# Altium PCB Earphone-3.PcbDoc
Units mm, origin at the board's own origin, x right, y up, seen from the top; angles counter-clockwise.
Board outline 24.54 x 47.47 mm, 2 copper layers (Top Layer, Bottom Layer); 43 components, 25 nets, 160 pads, 24 vias.
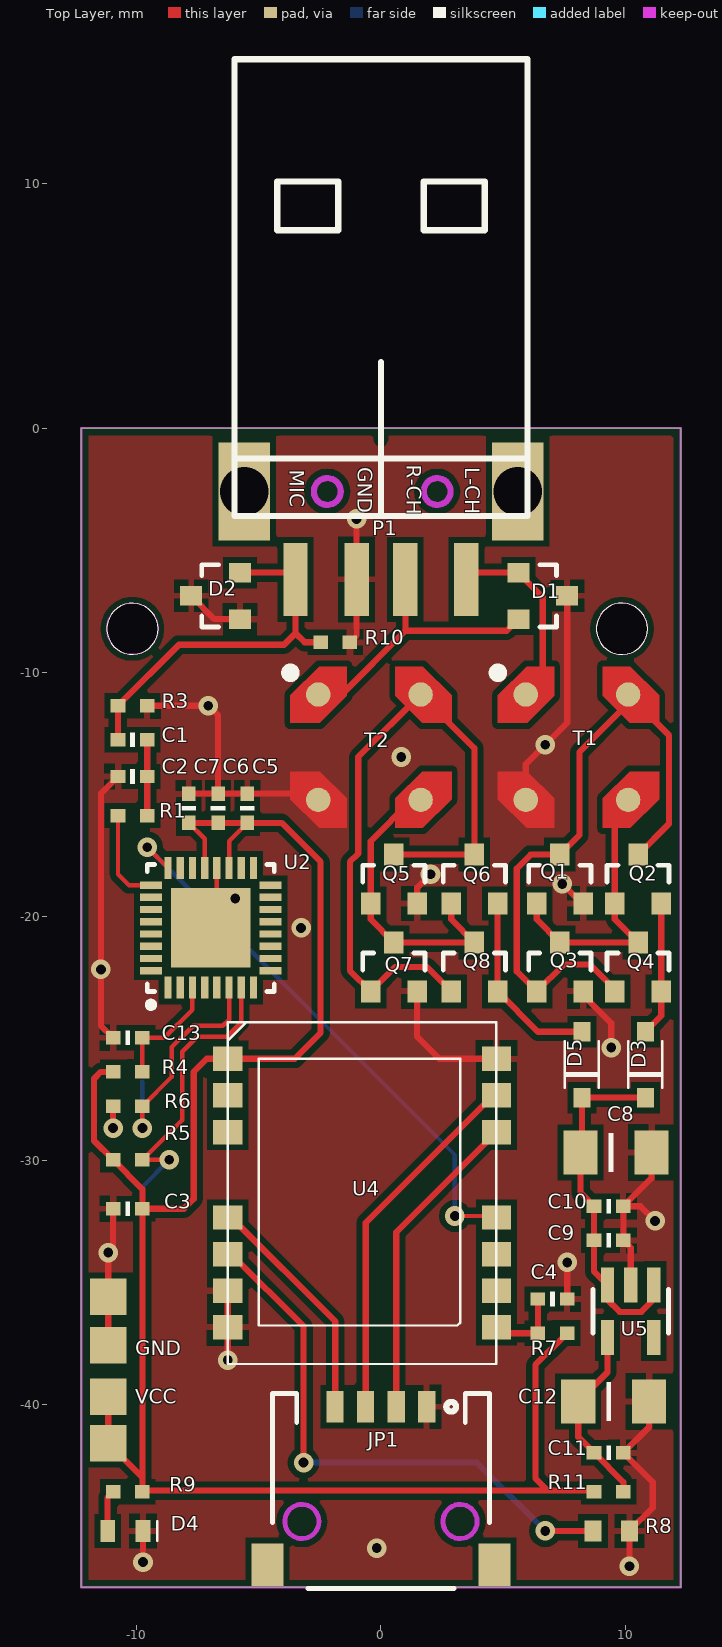
[diagram p0: Top Layer view]
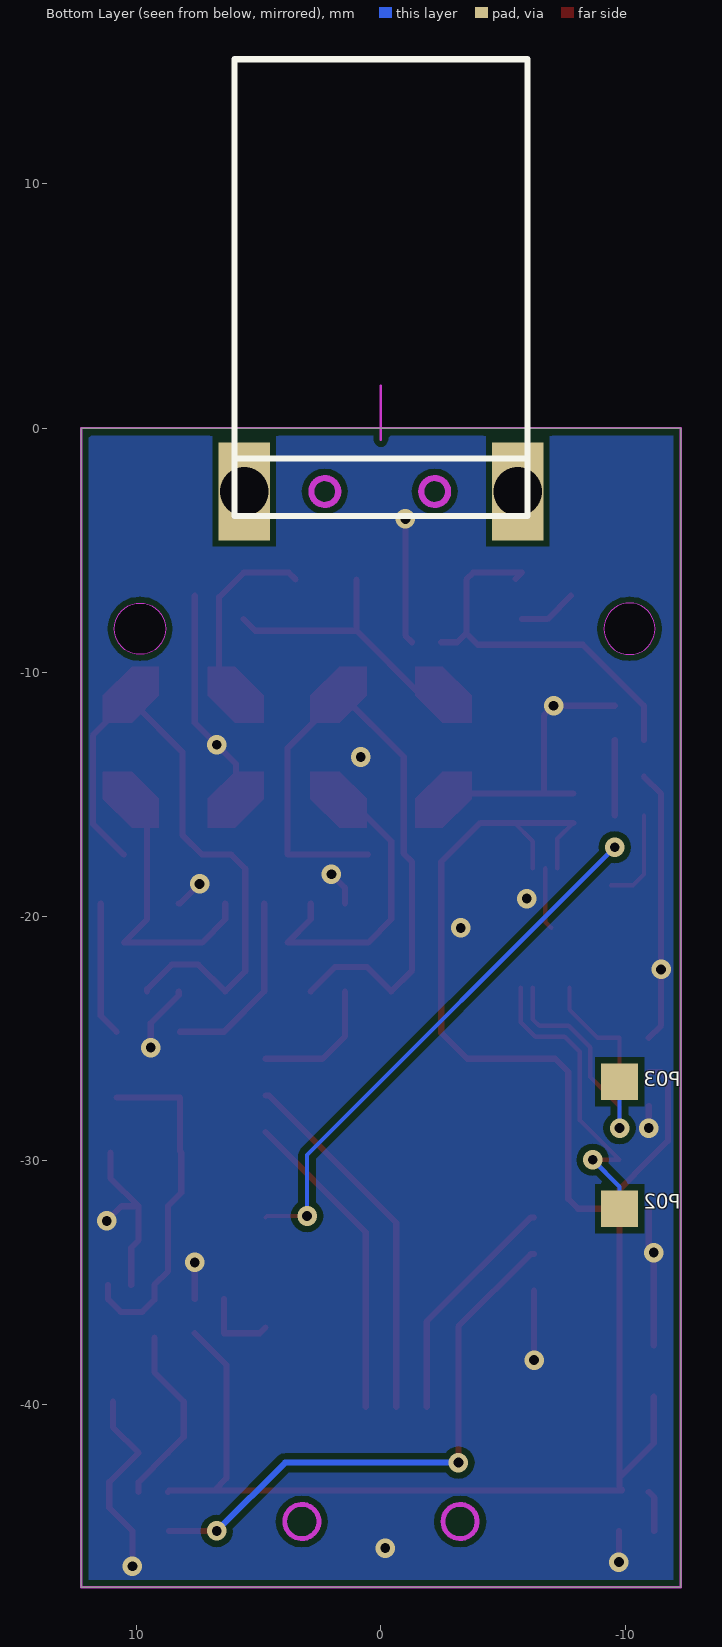
[diagram p1: Bottom Layer view, seen from below]
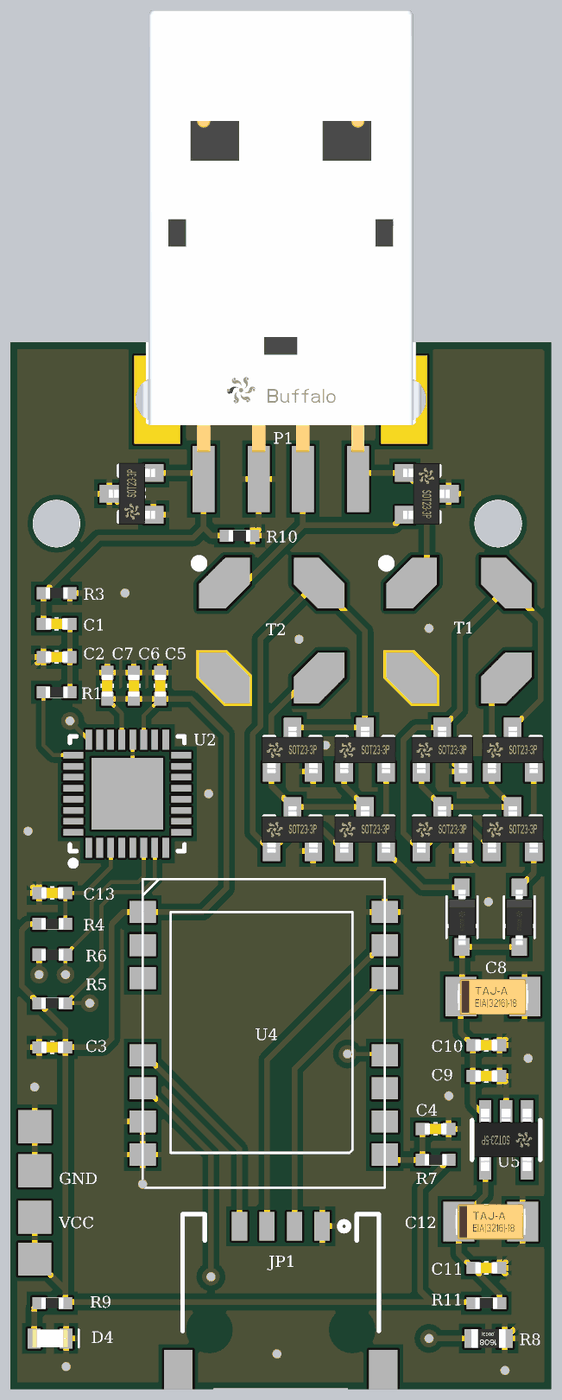
[diagram p2: 3D render of the assembled board from above, using the file's embedded part models]

## Layer stack, top to bottom
Top Solder: solder mask 0.0102, Solder Resist, Dk 3.5
Top Layer: signal copper 0.0356
Dielectric1: dielectric 0.32, FR-4, Dk 4.8
Bottom Layer: signal copper 0.0356
Bottom Solder: solder mask 0.0102, Solder Resist, Dk 3.5

## Board outline
-12.272,-47.474 -12.272,0 12.272,0 12.272,-47.474
cut-out: -10.182,-9.274 cw(c-10.182,-8.224) -11.232,-8.224 cw(c-10.182,-8.224) -10.182,-7.174 cw(c-10.182,-8.224) -9.132,-8.224 cw(c-10.182,-8.224)
cut-out: 8.818,-8.224 ccw(c9.868,-8.224) 9.868,-9.274 ccw(c9.868,-8.224) 10.918,-8.224 ccw(c9.868,-8.224) 9.868,-7.174 ccw(c9.868,-8.224)

## Design rules (kind name [scope] priority, off if disabled: settings)
Clearance [All] p1: gap=0.254
FabricationTestPointUsage TestPointUsage [All] p1: valid=0 allowmultiple=FALSE
FabricationTestpoint Testpoint [All] p1: side=3 testpointundercomponent=TRUE minsize=1.016 maxsize=2.54 preferedsize=1.524 minholesize=0 maxholesize=1.016 preferedholesize=0.813 testpointgrid=0.025 allowsidetop=TRUE allowsidebottom=TRUE usegrid=TRUE gridtolerance=0
HoleSize [All] p1: absolutevalues=TRUE maxlimit=2.54 minlimit=0.1 maxpercent=80.000 minpercent=20.000
HoleToHoleClearance [All] p1: gap=0.2 allowstackedmicrovias=TRUE
MinimumSolderMaskSliver [All] p1: minsoldermaskwidth=0.1
PolygonConnect PolygonConnect_1 [IsVia] p1: connectstyle=Direct reliefconductorwidth=0.254 reliefentries=4 polygonreliefangle="90 Angle" airgapwidth=0.254
PolygonConnect [All] p2: connectstyle=Relief reliefconductorwidth=0.254 reliefentries=4 polygonreliefangle="90 Angle" airgapwidth=0.254
RoutingVias [All] p1: holewidth=0.711 width=1.27 viastyle="Through Hole" minholewidth=0.1 minwidth=0.1 maxholewidth=0.711 maxwidth=1.27
SilkToSilkClearance [All] p1: silktosilkclearance=0.1
SilkToSolderMaskClearance SilkscreenOverComponentPads [IsPad] p1: minsilkscreentomaskgap=0.1 clearancetoexposedcopper=TRUE
SolderMaskExpansion [All] p1: expansion=0.102
Width [All] p1: maxlimit=0.254 minlimit=0.1 preferedwidth=0.254 minimp=50.000000 maximp=50.000000 favimp=50.000000
23 further rules are at their usual default settings.

## Components (designator, comment, footprint, x,y, rotation, side; value= is the part's Value field where it differs from the comment)
C1 "2.2uF" 0402C -10.172,-12.774 r0 top
C2 "47pF" 0402C -10.172,-14.274 r0 top
C3 "10uF" 0402C -10.372,-31.974 r180 top
C4 "1uF" 0402C 7.028,-35.674 r180 top
C5 "0.01uF" 0402C -5.472,-15.574 r270 top
C6 "0.01uF" 0402C -6.672,-15.574 r270 top
C7 "0.01uF" 0402C -7.872,-15.574 r270 top
C8 "CP6032-100uF" T3216-18[A] 9.628,-29.674 r0 top
C9 "1uF" 0402C 9.328,-33.274 r180 top
C10 "10uF" 0402C 9.328,-31.874 r180 top
C11 "10uF" 0402C 9.328,-41.974 r180 top
C12 "CP6032-100uF" T3216-18[A] 9.528,-39.874 r0 top
C13 "1uF" 0402C -10.372,-24.974 r0 top
D1 "PESD5V2S2UT" SOT23 6.628,-6.874 r270 top
D2 "PESD5V2S2UT" SOT23 -6.772,-6.874 r90 top
D3 "PMEG4002EJ" SOD323 10.828,-26.074 r90 top
D4 "LED" 0603L -10.472,-45.174 r0 top
D5 "PMEG4002EJ" SOD323 8.228,-26.074 r90 top
JP1 "TEST_PAPER" TEST_PAPER 0,-43.337 r0 top
P1 "EarPhone" USB-A 0,-4.4 r270 top
Q1 "N-MOSFET" SOT23 7.328,-18.474 r0 top
Q2 "P-MOSFET" SOT23 10.528,-18.474 r0 top
Q3 "N-MOSFET" SOT23 7.328,-22.074 r0 top
Q4 "P-MOSFET" SOT23 10.528,-22.074 r0 top
Q5 "N-MOSFET" SOT23 0.528,-18.474 r0 top
Q6 "P-MOSFET" SOT23 3.828,-18.474 r0 top
Q7 "N-MOSFET" SOT23 0.528,-22.074 r0 top
Q8 "P-MOSFET" SOT23 3.828,-22.074 r0 top
R1 "1K" 0402R -10.172,-15.874 r0 top
R3 "1K" 0402R -10.172,-11.374 r0 top
R4 "10K" 0402R -10.372,-26.374 r180 top
R5 "10K" 0402R -10.372,-29.974 r0 top
R6 "10K" 0402R -10.372,-27.774 r180 top
R7 "10K" 0402R 7.028,-37.074 r0 top
R8 "NTC" 0603R 9.428,-45.174 r180 top
R9 "10K" 0402R -10.372,-43.574 r180 top
R10 "2.2K" 0402R -1.872,-8.774 r0 top
R11 "0R" 0402R 9.328,-43.574 r180 top
T1 "LPR6235" "TRANS EMI" 8.028,-13.074 r0 top
T2 "LPR6235" "Trans EMI" -0.472,-13.074 r0 top
U2 "LPC822M101JHI33" QFN50P500X500X100-33N -6.972,-20.474 r90 top
U4 "RB1402" RB1402 -0.772,-31.336 r0 top
U5 "MIC5231" SOT23-5 10.228,-36.174 r180 top

## Footprints (in the part's own frame and the unit in brackets; to place one, negate y for a bottom-side part, rotate by r counter-clockwise, add the part's x,y. Pads: shape width x height; smd on the part's side, far side on the other; paste and mask are expansions set on the pad)
0402C [mm]
  rect 0.6x0.55 smd: 1(-0.6,0) 2(0.6,0)
  silkscreen extent -0.1,-0.3 0.1,0.3, body extent -0.5,-0.25 0.5,0.25, height 0.5
0402R [mm]
  rect 0.6x0.55 smd: 1(-0.6,0) 2(0.6,0)
  body extent -0.5,-0.25 0.5,0.25, height 0.35
0603L [mm]
  rect 0.6x0.9 smd: 1(-0.725,0) 2(0.725,0)
  silkscreen extent 1.3,-0.4 1.3,0.4, body extent -0.8,-0.41 0.8,0.39, height 0.6
0603R [mm]
  rect 0.7x0.85 smd: 1(-0.75,0) 2(0.75,0)
  body extent -0.77,-0.43 0.77,0.43, height 0.46
QFN50P500X500X100-33N [mm]
  rect 0.9x0.3 smd: 1(-2.45,1.75) 2(-2.45,1.25) 3(-2.45,0.75) 4(-2.45,0.25) 5(-2.45,-0.25) 6(-2.45,-0.75) 7(-2.45,-1.25) 8(-2.45,-1.75) 17(2.45,-1.75) 18(2.45,-1.25) 19(2.45,-0.75) 20(2.45,-0.25) 21(2.45,0.25) 22(2.45,0.75) 23(2.45,1.25) 24(2.45,1.75)
  rect 0.3x0.9 smd: 9(-1.75,-2.45) 10(-1.25,-2.45) 11(-0.75,-2.45) 12(-0.25,-2.45) 13(0.25,-2.45) 14(0.75,-2.45) 15(1.25,-2.45) 16(1.75,-2.45) 25(1.75,2.45) 26(1.25,2.45) 27(0.75,2.45) 28(0.25,2.45) 29(-0.25,2.45) 30(-0.75,2.45) 31(-1.25,2.45) 32(-1.75,2.45)
  rect 3.25x3.25 smd: 33(0,0)
  silkscreen extent -3.27,-2.6 2.6,2.6
RB1402 [mm]
  rect 1.2x1 smd: 1(-5.5,5.5) 2(-5.5,4) 3(-5.5,2.5) 4(-5.5,-1) 5(-5.5,-2.5) 6(-5.5,-4) 7(-5.5,-5.5) 8(5.5,-5.5) 9(5.5,-4) 10(5.5,-2.5) 11(5.5,-1) 12(5.5,2.5) 13(5.5,4) 14(5.5,5.5)
  silkscreen extent -5.5,-7 5.5,7
SOD323 [mm]
  rect 0.8x0.7 smd: 1(-1.35,0) 2(1.35,0)
  silkscreen extent -0.95,-0.7 0.95,0.7, body extent -1.26,-0.63 1.24,0.63, height 1.1
SOT23 [mm]
  rect 0.8x0.9 smd: 1(-0.95,-1) 2(0.95,-1) 3(0,1)
  silkscreen extent -1.28,-0.13 1.28,0.57, body extent -1.4,-1.07 1.4,1.03, height 0.9
SOT23-5 [mm]
  rect 0.55x1.45 smd: 1(-0.95,-1.075) 2(0,-1.075) 3(0.95,-1.075) 4(0.95,1.075) 5(-0.95,1.075)
  silkscreen extent -1.55,-0.9 1.55,0.9, body extent -1.45,-1.42 1.45,1.4, height 1.1
T3216-18[A] [mm]
  rect 1.4x1.8 smd: 1(-1.45,0) 2(1.45,0)
  silkscreen extent -0.3,-0.8 -0.1,0.8, body extent -1.6,-0.81 1.6,0.79, height 1.62
TEST_PAPER [mm]
  rect 1.3x1.8 smd: 0(-4.65,-3.25) 0(4.65,-3.25)
  rect 0.7x1.3 smd: 1(1.875,3.25) 2(0.625,3.25) 3(-0.625,3.25) 4(-1.875,3.25)
  Keep-Out Layer circle w0.2: c3.24,-1.45 r0.7
  Keep-Out Layer circle w0.2: c-3.24,-1.45 r0.7
  silkscreen extent -4.45,-4.2 4.45,3.8
"TRANS EMI" [mm]
  round 1 smd: 1(-2.095,2.159) 2(-2.095,-2.159) 3(2.095,-2.159) 4(2.095,2.159)
  Top Layer region: 1.064,2.1 2.164,1 3.364,1 3.364,2.125 2.188,3.3 1.064,3.3
  Top Layer region: 1.064,-3.3 1.064,-2.1 2.164,-1 3.364,-1 3.364,-2.125 2.188,-3.3
  Top Layer region: -3.237,-2.125 -2.061,-3.3 -0.937,-3.3 -0.937,-2.1 -2.037,-1 -3.237,-1
  Top Layer region: -3.237,1 -3.237,2.125 -2.061,3.3 -0.937,3.3 -0.937,2.1 -2.037,1
  silkscreen extent -3.37,2.92 -3.11,3.17
"Trans EMI" [mm]
  round 1 smd: 1(-2.095,2.159) 2(-2.095,-2.159) 3(2.095,-2.159) 4(2.095,2.159)
  Top Layer region: 1.064,2.1 2.164,1 3.364,1 3.364,2.125 2.188,3.3 1.064,3.3
  Top Layer region: 1.064,-3.3 1.064,-2.1 2.164,-1 3.364,-1 3.364,-2.125 2.188,-3.3
  Top Layer region: -3.237,-2.125 -2.061,-3.3 -0.937,-3.3 -0.937,-2.1 -2.037,-1 -3.237,-1
  Top Layer region: -3.237,1 -3.237,2.125 -2.061,3.3 -0.937,3.3 -0.937,2.1 -2.037,1
  silkscreen extent -3.37,2.92 -3.11,3.17
USB-A [mm]
  rect 3x1 smd: 1(1.8,3.5) 2(1.8,1) 3(1.8,-1) 4(1.8,-3.5)
  rect 4x2.1 hole 2: 5(-1.8,5.6) 6(-1.8,-5.6)
  Keep-Out Layer circle w0.254: c-1.8,-2.2 r0.55
  Keep-Out Layer circle w0.254: c-1.8,2.3 r0.55
  silkscreen extent -19.5,-6 -0.8,6, body extent -19.43,-6.35 0.59,6.35, height 3.1

## Part data
C1 C2 C3 C4 C5 C6 C7 C9 C10 C11 C13: library part CAP
C8 C12: library part "CAP POL2"
D1 D2: "SOT23"
D3 D5: "SOD323F"
Q1 Q3 Q5 Q7: "4N80 N-Channel MOSFET"
Q2 Q4 Q6 Q8: "P-Channel MOSFET"
R1 R3 R4 R5 R6 R7 R8 R9 R10 R11: library part RES
T1 T2: library part "Trans EMI"

## Free pads (board coordinates)
  rect 1.5x1.5 smd far side: 0(-9.772,-26.774) 1(-9.772,-31.974)
  rect 1.5x1.5 smd: 1(-11.172,-41.574) 1(-11.172,-39.674) 1(-11.172,-37.574) 1(-11.172,-35.574)

## Via types
v1: diameter 0.8, hole 0.4, Top Layer to Bottom Layer, tented both sides, 24 vias

## Nets (pads, with @x,y where several pads share a name; then routed paths per layer and width w, separated by ;. In a path a pad name is that pad's centre, name@x,y a point inside that pad or via, vN(x,y) a via of type N, cw(c..) or ccw(c..) an arc to the next point about the centre after c; other vN are vias at no path point)
AINO: JP1.4 U4.4 | length 9.7
  Top Layer w0.254: U4.4 -6.133,-32.336 -1.875,-36.593 JP1.4
GND: C2.1 C3.2 C4.1 C5.1 C6.1 C7.1 C8.2 C9.1 C10.1 C11.1 C12.2 C13.1 D1.3 D2.1 D2.3 D4.2 JP1.1 P1.3 pad.1@-11.172,-35.574 pad.1@-11.172,-37.574 Q1.2 Q3.2 Q5.2 Q7.2 R3.2 R6.2 R8.1 R10.2 T1.2 T2.2 U2.20 U2.33 U4.6 U4.7 U4.14 U5.2 | length 80.8
  Top Layer w0.18: U2.33 -6.722,-20.224 U2.20
  Top Layer w0.254: pad.1@-11.172,-37.574 -11.172,-35.574 v1(-11.172,-33.774) -10.972,-33.574 C3.2 ; v1(-10.972,-28.674) R6.2 ; C13.1 -11.472,-24.474 -11.472,-14.974 C2.1 ; v1(-9.747,-46.449) D4.2 ; R3.2 v1(-7.072,-11.374) -6.672,-11.774 C6.1 ; C7.1 C6.1 ; D2.3 -6.822,-7.824 D2.1 ; v1(-6.272,-38.174) U4.7 U4.6 ; T2.2 -2.826,-14.974 C5.1 C6.1 ; R10.2 -1,-8.502 P1.3 v1(-1,-3.724) ; Q7.2 1.478,-24.924 2.39,-25.836 U4.14 ; Q5.2 1.478,-18.824 v1(2.028,-18.274) ; T1.2 5.933,-13.769 v1(6.728,-12.974) 7.628,-12.074 D1.3 ; v1(7.428,-18.674) 8.228,-19.474 Q1.2 ; C4.1 v1(7.628,-34.174) ; Q3.2 8.278,-23.224 9.428,-24.374 v1(9.428,-25.374) ; v1(10.178,-46.624) R8.1 11.128,-44.224 11.128,-43.174 C11.1 10.978,-40.924 C12.2 ; U5.2 10.228,-33.574 C9.1 C10.1 ; C8.2 11.078,-30.724 C10.1 ; v1(11.228,-32.474) 10.628,-31.874 C10.1
  other v1: -0.172,-45.874 -11.472,-22.174 -3.272,-20.474 -5.972,-19.274 0.828,-13.474
L-CH: D1.1 P1.1 T1.1 | length 7.8
  Top Layer w0.254: P1.1 3.776,-5.924 D1.1 6.628,-6.924 6.628,-10.519 T1.1@6.233,-10.915
MIC: C1.1 D2.2 P1.4 R3.1 R10.1 | length 16
  Top Layer w0.254: C1.1 R3.1 -8.272,-8.874 -3.972,-8.874 -3.5,-8.402 ; D2.2@-5.523,-6.173 D2.2 -3.776,-5.924 P1.4 -3.5,-8.402 ; R10.1 -3.128,-8.774 -3.5,-8.402
NetC1_2: C1.2 C2.2 R1.2 | length 3.1
  Top Layer w0.254: R1.2 C2.2 C1.2
NetC4_2: C4.2 R7.1 U4.8 | length 3.2
  Top Layer w0.254: U4.8 4.966,-37.074 R7.1 C4.2
NetC11_2: C11.2 C12.1 R11.1 U5.4 | length 7.6
  Top Layer w0.254: U5.4 9.278,-38.674 C12.1 8.078,-41.324 C11.2 9.928,-43.174 R11.1
NetD3_2: D3.2 Q2.2 Q4.2 | length 5.5
  Top Layer w0.254: D3.2 11.478,-24.074 Q4.2 Q2.2
NetD4_1: D4.1 R9.2 | length 1.7
  Top Layer w0.254: D4.1 -11.197,-43.799 R9.2
NetD5_2: D5.2 Q6.2 Q8.2 | length 7.7
  Top Layer w0.254: Q6.2 Q8.2 6.428,-24.724 D5.2
NetQ1_1: Q1.1 Q2.1 Q3.3 Q4.3 T1.3 | length 11.7
  Top Layer w0.254: Q1.1 6.378,-20.124 Q3.3 Q4.3 9.578,-20.124 Q2.1 9.578,-15.778 T1.3
NetQ1_3: Q1.3 Q2.3 Q3.1 Q4.1 T1.4 | length 27
  Top Layer w0.254: Q4.1 9.578,-22.985 8.567,-21.974 7.478,-21.974 Q3.1 5.559,-22.255 5.559,-18.043 6.128,-17.474 Q1.3 8.128,-16.674 8.128,-13.274 10.124,-11.278 T1.4 11.797,-12.588 11.797,-16.205 Q2.3
NetQ5_1: Q5.1 Q6.1 Q7.3 Q8.3 T2.3 | length 12.6
  Top Layer w0.254: T2.3 1.269,-15.233 -0.422,-16.924 Q5.1 -0.422,-20.124 Q7.3 Q8.3 2.878,-20.124 Q6.1
NetQ5_3: Q5.3 Q6.3 Q7.1 Q8.1 T2.4 | length 28.6
  Top Layer w0.254: Q5.3 Q6.3 3.828,-13.119 T2.4 -0.93,-13.468 -0.93,-17.432 -1.272,-17.774 -1.272,-22.224 Q7.1 0.578,-22.074 1.878,-22.074 Q8.1
NTC: R8.2 U4.5 | length 22.9
  Top Layer w0.254: U4.5 -6.133,-33.836 -3.172,-36.797 v1(-3.172,-42.374) ; v1(6.728,-45.174) R8.2
  Bottom Layer w0.254: v1(-3.172,-42.374) 3.928,-42.374 v1(6.728,-45.174)
P02: pad.1@-9.772,-31.974 R5.2 U2.7 | length 13
  Top Layer w0.18: v1(-8.672,-29.974) R5.2 -8.143,-28.345 -8.143,-25.545 -7.529,-24.93 -6.315,-24.93 -5.722,-24.337 U2.7
  Bottom Layer w0.18: pad.1@-9.772,-31.974 -9.772,-31.074 v1(-8.672,-29.974)
P03: pad.0 R6.1 U2.6 | length 9.8
  Top Layer w0.18: v1(-9.772,-28.674) R6.1 -8.577,-26.579 -8.577,-25.365 -7.692,-24.48 -6.479,-24.48 -6.222,-24.224 U2.6
  Bottom Layer w0.18: v1(-9.772,-28.674) pad.0
P05: C13.2 R4.1 U2.3 | length 4.8
  Top Layer w0.18: R4.1 C13.2 -8.872,-24.974 -7.722,-23.824 U2.3
P14: R1.1 U2.25 | length 3.9
  Top Layer w0.18: R1.1 -10.772,-18.274 -10.322,-18.724 U2.25
PT15: JP1.2 U4.12 | length 13
  Top Layer w0.254: JP1.2 0.625,-32.939 U4.12
PT16: JP1.3 U4.13 | length 15
  Top Layer w0.254: JP1.3 -0.625,-32.55 4.589,-27.336 U4.13
R-CH: D1.2 P1.2 T2.1 | length 11.6
  Top Layer w0.254: T2.1 -1.613,-10.915 1,-8.302 ; P1.2 1,-8.302 ; D1.2 5.15,-8.302 1,-8.302
RXD: U2.24 U4.11 | length 23.2
  Top Layer w0.18: v1(-9.572,-17.174) U2.24 ; v1(3.028,-32.274) 4.666,-32.274 U4.11
  Bottom Layer w0.18: v1(-9.572,-17.174) 3.028,-29.774 v1(3.028,-32.274)
VCC: C3.1 C5.2 C6.2 C7.2 pad.1@-11.172,-39.674 pad.1@-11.172,-41.574 R4.2 R5.1 R7.2 R9.1 R11.2 U2.19 U2.21 U4.1 | length 78.9
  Top Layer w0.18: C7.2 -7.222,-16.824 U2.21 ; U2.19 -6.222,-16.924 C5.2
  Top Layer w0.254: pad.1@-11.172,-39.674 -11.172,-41.574 -9.772,-42.974 ; R4.2 -11.472,-26.374 -11.753,-26.655 -11.753,-29.193 R5.1 -9.772,-31.174 C3.1 ; R9.1@-9.872,-43.474 -9.872,-43.519 6.828,-43.519 ; R9.1@-9.772,-43.419 -9.772,-42.974 ; C7.2 C6.2 C5.2 -4.072,-16.174 -2.472,-17.774 -2.472,-24.774 -3.534,-25.836 U4.1 -7.134,-25.836 -7.672,-26.374 -7.672,-31.574 -8.072,-31.974 C3.1 ; R7.2 6.328,-38.374 6.328,-43.019 6.828,-43.519 ; R11.2 8.674,-43.519 6.828,-43.519 ; -9.772,-42.974 C3.1
VCCIN: C8.1 C9.2 C10.2 D3.1 D5.1 U5.1 U5.3 | length 14.2
  Top Layer w0.254: C8.1 8.178,-31.324 C10.2 C9.2 8.728,-34.549 U5.3 9.278,-35.71 9.773,-36.205 10.661,-36.205 11.178,-35.687 U5.1 ; C8.1@8.228,-29.624 D5.1 D3.1
pads on no net: JP1.0 P1.5 P1.6 U2.1 U2.2 U2.4 U2.5 U2.8 U2.9 U2.10 U2.11 U2.12 U2.13 U2.14 U2.15 U2.16 U2.17 U2.18 U2.22 U2.23 U2.26 U2.27 U2.28 U2.29 U2.30 U2.31 U2.32 U4.2 U4.3 U4.9 U4.10 U5.5

## Polygon pours and split planes (outlines as drawn)
GND on Bottom Layer "Top Layer-No Net" (solid, remove dead copper, pour order 6): -12.272,0 12.272,0 12.272,-47.474 -12.272,-47.474
GND on Top Layer "Top Layer-No Net" (solid, remove dead copper, pour order 4): -12.272,0 12.272,0 12.272,-47.474 -12.272,-47.474

## Keep-outs
Keep-Out Layer:
  lines w0.1: 0,-0.474 0,1.726 ; -12.272,-47.474 12.272,-47.474 12.272,0 -12.272,0 -12.272,-47.474

## Silkscreen, mask and mechanical layers (free items; w line width, h text height)
Top Overlay:
  circle w0.051: c9.868,-8.224 r1.05
  circle w0.051: c-10.182,-8.224 r1.05
  text "GND" at -10.072,-38.174 h1.02
  text "VCC" at -10.072,-40.174 h1.02
Bottom Overlay:
  text "P03" at -12.272,-27.174 h1.02
  text "P02" at -12.272,-32.174 h1.02

## Text inside footprints (layer, text, board x,y; h text height)
C8: Mechanical 15 "-" at 10.517,-30.055 h1.02; Mechanical 15 "+" at 8.231,-30.182 h1.02
C12: Mechanical 15 "-" at 10.417,-40.255 h1.02; Mechanical 15 "+" at 8.131,-40.382 h1.02
P1: Top Overlay "GND" at -1.15,-1.601 h1.02 r270; Top Overlay "R-CH" at 0.85,-1.501 h1.02 r270; Top Overlay "MIC" at -3.95,-1.701 h1.02 r270; Top Overlay "L-CH" at 3.25,-1.601 h1.02 r270
U2: Mechanical 15 "1" at -6.522,-20.638 h1.02 r90